# EAGLE board alib (EAGLE 7.4.0)
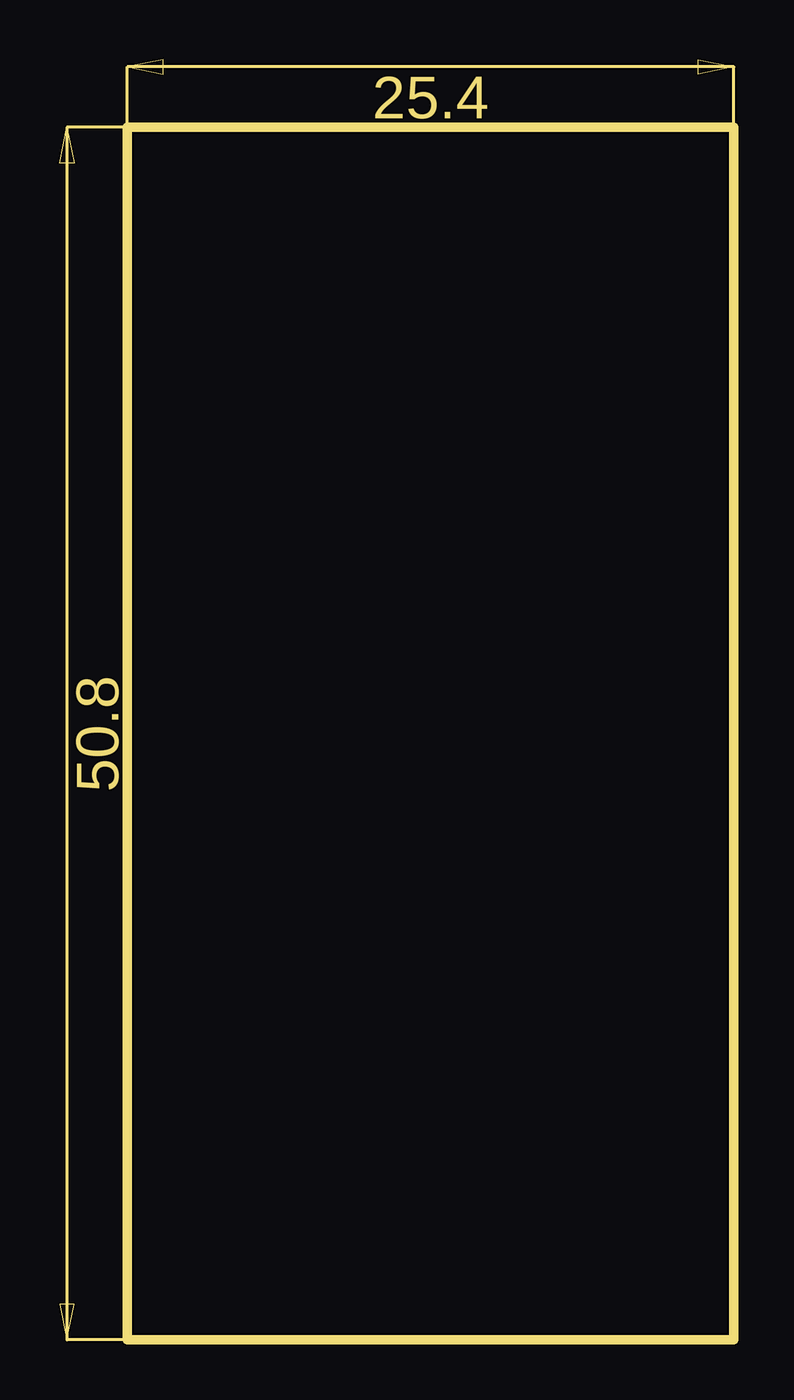
[diagram p0: board, top side]
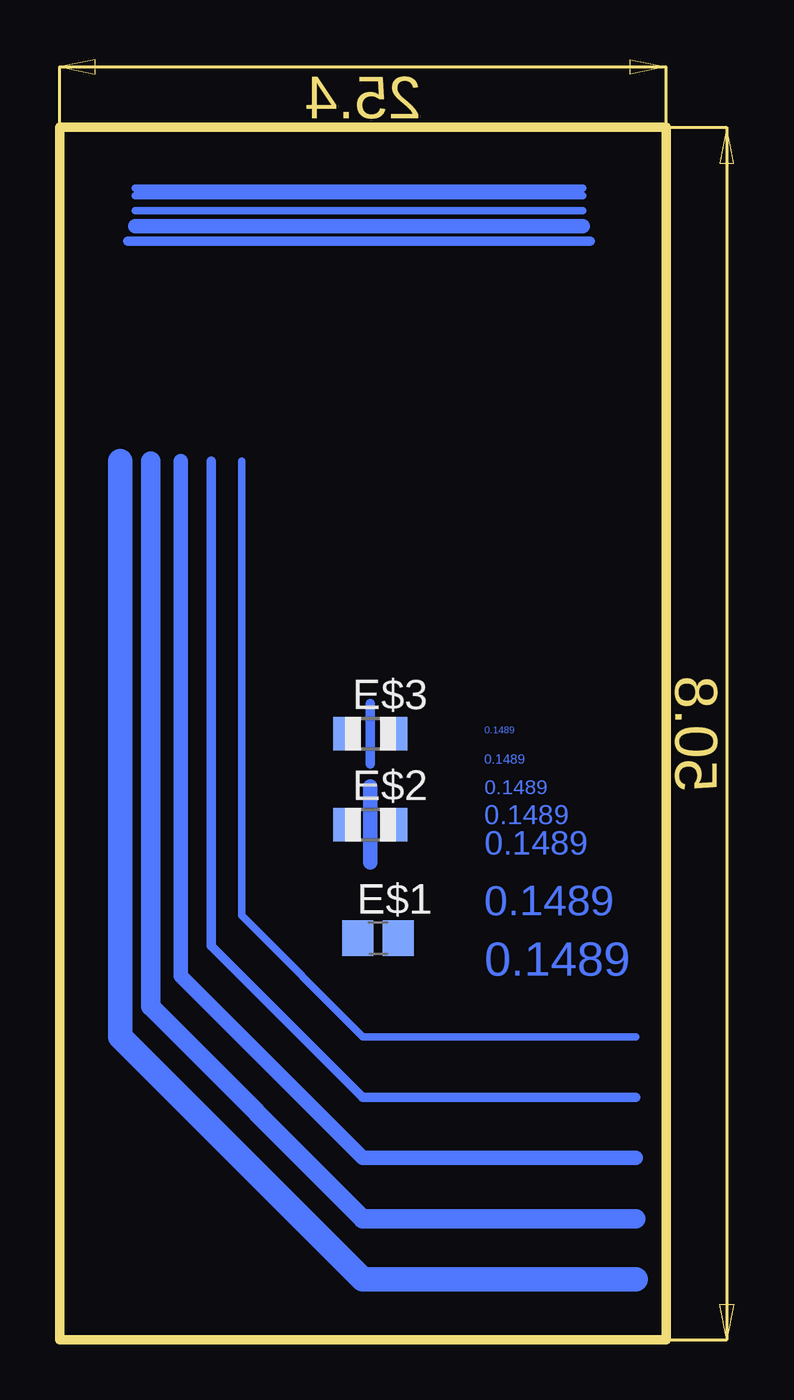
[diagram p1: board, bottom side, seen from below]

Size 25.4 x 50.8 mm. Coordinates in mm from the lower left corner, seen from the top.
Outline: 0,0 25.4,0 25.4,50.8 0,50.8 0,0
Copper layers (1*16): Top 0.035mm / dielectric 1.5mm / Bottom 0.035mm
Design rules "default": minimum track width 10mil, minimum drill 24mil, track to track 8mil, track to pad 8mil, pad to pad 8mil, via to via 8mil, smd to smd 8mil, copper to edge 40mil, drill to drill 8mil, minimum pad ring 10mil, minimum via ring 8mil, stop-mask expansion 4mil, vias tented up to drill 0mil, thermal gap 10mil

## Footprints (pad centres in the part's own frame; a part is rotated, then mirrored left to right if it is on the bottom)
C0805 = smd 1.3 x 1.5: 1 -0.85,0; 2 0.85,0
R0805 = smd 1.1 x 1.4: 1 -1,0; 2 1,0

## Placement (x,y rotation side)
E$1  [C0805]  12.06,16.83 0 bottom
E$2  [R0805]  12.38,21.59 0 bottom
E$3  [R0805]  12.38,25.4 0 bottom

## Library data of the parts
E$1-E$3 = adafruit

## Tracks (layer width: path | path; a pad name or v marks a point on that pad's centre or on a via)
S$1
  Bottom 1.016: 22.86,36.83 22.86,12.7 12.7,2.54 1.27,2.54
S$2
  Bottom 0.813: 21.59,36.83 21.59,13.97 12.7,5.08 1.27,5.08
S$3
  Bottom 0.61: 20.32,36.83 20.32,15.24 12.7,7.62 1.27,7.62
S$4
  Bottom 0.406: 19.05,36.83 19.05,16.51 12.7,10.16 1.27,10.16
S$5
  Bottom 0.305: 17.78,36.83 17.78,17.78 12.7,12.7 1.27,12.7
S$6
  Bottom 0.305: 3.49,48.26 22.23,48.26
S$7
  Bottom 0.305: 3.49,47.94 22.23,47.94
S$8
  Bottom 0.305: 22.23,47.31 3.49,47.31
S$9
  Bottom 0.61: 3.49,46.67 22.23,46.67
S$10
  Bottom 0.406: 3.17,46.04 22.54,46.04
S$11
  Bottom 0.406: 12.38,26.67 12.38,24.13
S$12
  Bottom 0.61: 12.38,23.18 12.38,20

## Text on the board
Bottom: 0.1489 | 0.1489 | 0.1489 | 0.1489 | 0.1489 | 0.1489 | 0.1489